# Altium PCB soldering_station_handle.PcbDoc
Units mil, origin at the board's own origin, x right, y up, seen from the top; angles counter-clockwise.
Board outline 1430 x 300 mil, 2 copper layers (Top Layer, Bottom Layer); 11 components, 6 nets, 23 pads, 17 vias.
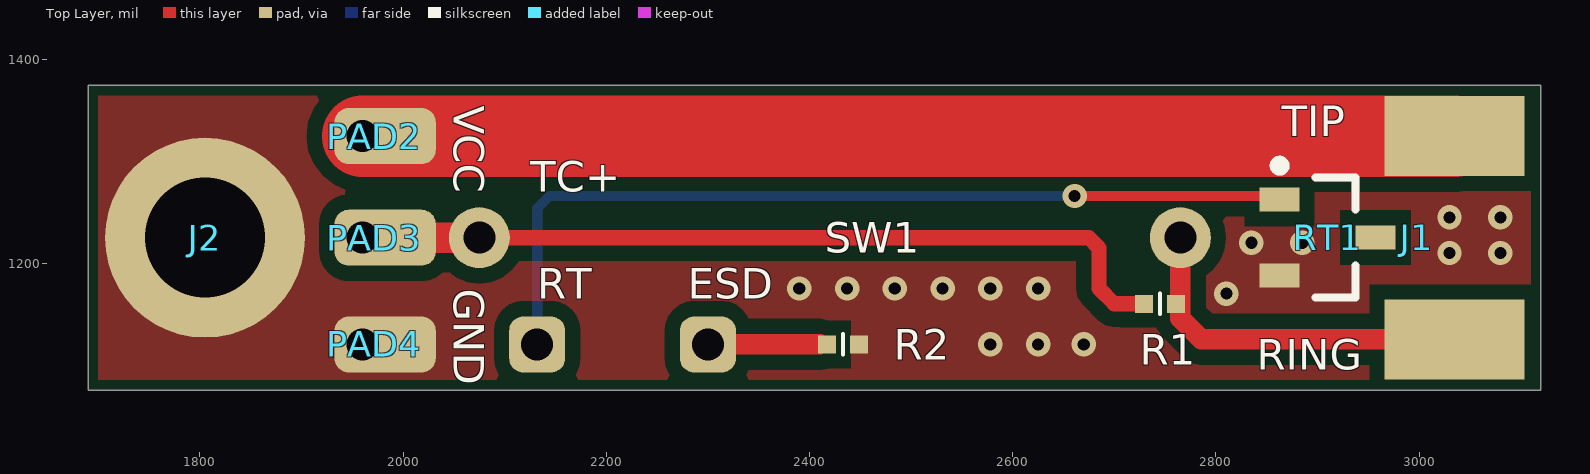
[diagram p0: Top Layer view]
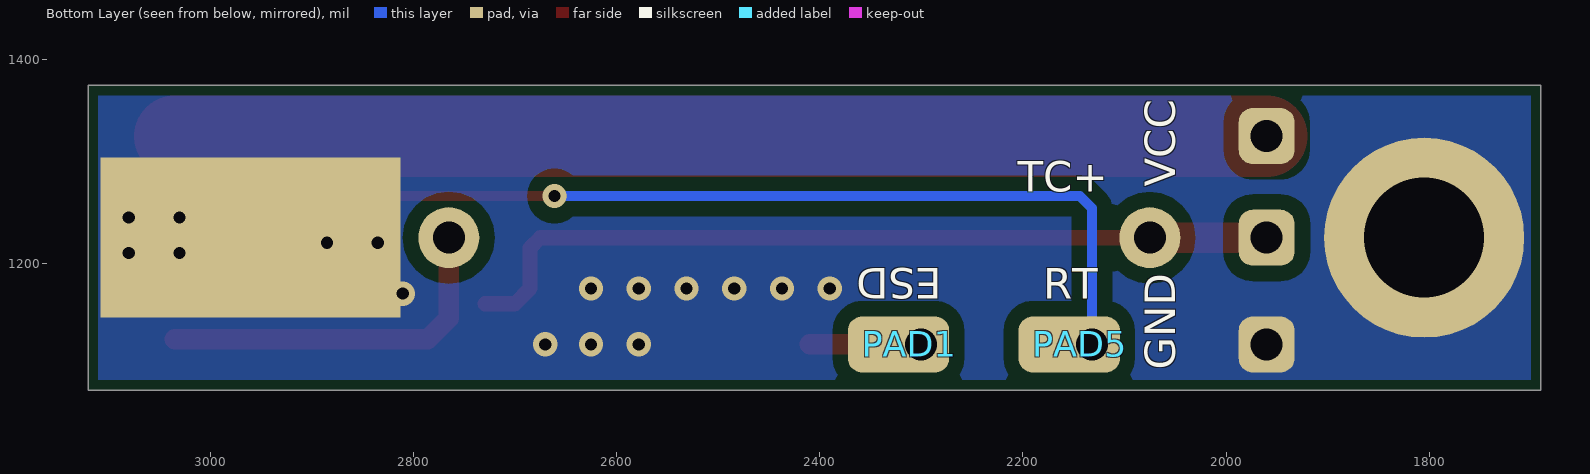
[diagram p1: Bottom Layer view, seen from below]

## Layer stack, top to bottom
Top Solder: solder mask 0.4, Solder Resist, Dk 3.5
Top Layer: signal copper 1.4
Dielectric 1: dielectric 12.6, FR-4, Dk 4.8
Bottom Layer: signal copper 1.4
Bottom Solder: solder mask 0.4, Solder Resist, Dk 3.5

## Board outline
1690,1075 3120,1075 3120,1375 1690,1375

## Design rules (kind name [scope] priority, off if disabled: settings)
BoardOutlineClearance [All] p1: gap=10 ignorepadtopadclearanceinfootprint=FALSE
Clearance [All] p1: gap=6 ignorepadtopadclearanceinfootprint=TRUE except(15: Arc-Poly Track-Poly SMDPad-Poly THPad-Poly Via-Poly Fill-Poly Poly-Poly)
DiffPairsRouting [All] p1: maxlimit=10 minlimit=6 mostfreqgap=7 toplayer_minwidth=6 toplayer_maxwidth=15 toplayer_prefwidth=6 bottomlayer_minwidth=6 bottomlayer_maxwidth=15 bottomlayer_prefwidth=6 maxuncoupledlength=500
HoleSize [All] p1: absolutevalues=TRUE maxlimit=248 minlimit=8 maxpercent=80.000 minpercent=20.000
MinimumSolderMaskSliver [All] p1: minsoldermaskwidth=1
PlaneConnect PlaneConnect_1 [All] p1: pad.planeconnectstyle=Relief pad.reliefexpansion=20 pad.reliefentries=4 pad.reliefconductorwidth=10 pad.reliefairgap=10 via.planeconnectstyle=Direct via.reliefexpansion=20 via.reliefentries=4 via.reliefconductorwidth=10 via.reliefairgap=10
PolygonConnect [All] p1: connectstyle=Direct reliefconductorwidth=20 reliefentries=4 polygonreliefangle="90 Angle" airgapwidth=10
RoomDefinition U_TXS0102YZPR1 [InComponentClass('U_TXS0102YZPR1')] p1: confinementstyle=ConfineIn formatcopy=TRUE lockcomponents=FALSE outline 3080,4000 3295,4000 3295,4195 3080,4195
RoutingVias [All] p1: holewidth=12 width=24 viastyle="Through Hole" minholewidth=11.81 minwidth=24 maxholewidth=12 maxwidth=24
SilkToSolderMaskClearance SilkToSolderMaskClearance_R0402 [HasFootprint('R_0402_1005')] p1: minsilkscreentomaskgap=4 clearancetoexposedcopper=TRUE
SilkToSolderMaskClearance [IsPad] p2: minsilkscreentomaskgap=5 clearancetoexposedcopper=TRUE
SolderMaskExpansion [InPadClass('All Pads')] p1: expansion=3
Width [All] p1: maxlimit=100 minlimit=6 preferedwidth=15 minimp=50.000000 maximp=50.000000 favimp=50.000000
25 further rules are at their usual default settings.

## Components (designator, comment, footprint, x,y, rotation, side; value= is the part's Value field where it differs from the comment)
J1 "PJ-392" PJ-392_Edge 3050,1225 r0 top
J2 "Cable soldering" J_HOLE3 1805,1225 r0 top value="3mm hole"
PAD1 "ESD" PAD_08mm 2300,1120 r90 top value="=\"Manufacturer Part Number\""
PAD2 "VCC" PAD_08mm 1960,1325 r270 bottom value="=\"Manufacturer Part Number\""
PAD3 "TC+" PAD_08mm 1960,1225 r270 bottom value="=\"Manufacturer Part Number\""
PAD4 "GND" PAD_08mm 1960,1120 r270 bottom value="=\"Manufacturer Part Number\""
PAD5 "RT" PAD_08mm 2132,1120 r90 top value="=\"Manufacturer Part Number\""
R1 "Resistor" R_0402_1005 2745,1160 r0 top value=1k
R2 "Resistor" R_0402_1005 2433,1120 r0 top value=0R
RT1 "KTY82-210" KTY82-210 2910,1225 r0 top value=1.98k
SW1 "KSK-1A66-1015" KSK-1A66-1015 2430,1230 r180 top

## Footprints (in the part's own frame and the unit in brackets; to place one, negate y for a bottom-side part, rotate by r counter-clockwise, add the part's x,y. Pads: shape width x height; smd on the part's side, far side on the other; paste and mask are expansions set on the pad)
J_HOLE3 [mm]
  round 5 hole 3: 1(0,0)
KSK-1A66-1015 [mil] "Kontaktron; Zakres: 10÷15AT; Pprze³: 10W; O2,2x14mm; Styki: SPST-NO"
  round 60 hole 31.5: 1(355,5) 2(-335,5)
  body extent -344,-40 364,47, height 112
KTY82-210 [mm] "Czujnik temperatury; -55÷150°C; SOT23; SMD; 1,98k?"
  rect 1x0.6 smd: 1(-1.2,0.95) 2(-1.2,-0.95) 3(1.2,0)
  silkscreen extent -1.32,-1.5 0.7,1.92, body extent -1.3,-1.5 1.3,1.5, height 1.2
PAD_08mm [mm]
  rrect50% 1.4x1.4 hole 0.8: 1(0,0)
  rrect50% 1.4x2.5 smd far side: 1(0,-0.584)
PJ-392_Edge [mm] "PJ-392_Stereo_Jack_3.5mm_Edge"
  rect 7.5x4 smd far side: 1(-2.286,0)
  rect 3.5x2 smd: 2(-0.381,-2.54) 3(-0.381,2.54)
  body extent -4.92,-3.94 17.88,3.94, height 5.15
R_0402_1005 [mm]
  rect 0.45x0.45 smd: 1(-0.4,0) 2(0.4,0)
  silkscreen extent 0,-0.25 0,0.25, body extent -0.52,-0.3 0.52,0.3, height 0.34

## Part data
J1: library part PJ-392_Jack_Plug, "PCB Edge Mount"
J2: library part J_HOLE3, "Single pin connector", Component Type="Standard (No BOM)", Part Number=J_HOLE3, SCH_Footprint=Cable, Supplier 1=TME, Supplier 2="RS Components", Supplier 3=Farnell, Supplier 4=Mouser, Supplier 5=Digi-Key
PAD1 PAD2 PAD3 PAD4 PAD5: library part J_PAD, "PCB Pad", Component Type=Standard, Part Number=J_PAD, SCH_Footprint=1.4x2.5mm, Supplier 1=TME, Supplier 2="RS Components", Supplier 3=Farnell, Supplier 4=Mouser, Supplier 5=Digi-Key
R1: library part R_1k_0402_1, Manufacturer=Yageo, Manufacturer Part Number=RC0402FR-071K, Power=63mW, Tolerance=1%, Voltage=50V, HelpURL=http://www.tme.eu/pl/Document/1a2bc76e2be68b3b1670068306778ce6/rc0402yageo.pdf, Part Number=R_1k_0402_1, SCH_Footprint=0402, Supplier 1=TME, Supplier 2="RS Components", Supplier 3=Farnell, Supplier 4=Mouser, Supplier 5=Digi-Key, Supplier Part Number 1=RC0402FR-071K, Supplier Part Number 3=9239235, Supplier Part Number 4=603-RC0402FR-071KP, Supplier Part Number 5=311-1.00KLRCT-ND
R2: library part R_0R_0402_5, Manufacturer=Rohm, Manufacturer Part Number=PMR01ZZPJ000, Power=100mW, Tolerance=5%, Voltage=50V, HelpURL=https://pl.mouser.com/datasheet/2/348/pmr-jpw-e-1139188.pdf, Part Number=R_0R_0402_5, SCH_Footprint=0402, Supplier 1=TME, Supplier 2="RS Components", Supplier 3=Farnell, Supplier 4=Mouser, Supplier 5=Digi-Key, Supplier Part Number 4=755-PMR01ZZPJ000, Supplier Part Number 5=RHM1692-6-ND
RT1: "Czujnik temperatury; -55÷150°C; SOT23; SMD; 1,98k?"
SW1: "Kontaktron; Zakres: 10÷15AT; Pprze³: 10W; O2,2x14mm; Styki: SPST-NO"

## Via types
v1: diameter 24, hole 12, Top Layer to Bottom Layer, 17 vias

## Nets (pads, with @x,y where several pads share a name; then routed paths per layer and width w, separated by ;. In a path a pad name is that pad's centre, name@x,y a point inside that pad or via, vN(x,y) a via of type N, cw(c..) or ccw(c..) an arc to the next point about the centre after c; other vN are vias at no path point)
GND: J1.1 J2.1 PAD4.1 R2.2 RT1.2
  other v1: 2578,1120 2625,1120 2670,1120 2810.39,1170 2390,1175 2437,1175 2484,1175 2531,1175 2578,1175 2625,1175 3030,1210 3080,1210 2835,1220 2885,1220 3030,1245 3080,1245
HT: J1.3 PAD2.1 | length 1075
  Top Layer w80: PAD2.1@1960,1325 1983,1325 J1.3
NetPAD1_1: PAD1.1 R2.1 | length 110
  Top Layer w20: PAD1.1@2300,1120 R2.1@2410,1120
NetPAD3_1: PAD3.1 R1.1 SW1.1 | length 819.6
  Top Layer w15: SW1.1 2675,1225 2685,1215 2685,1175 2700,1160 R1.1
  Top Layer w30: PAD3.1@1960,1225 1983,1225 SW1.1
NetPAD5_1: PAD5.1 RT1.1 | length 878.3
  Top Layer w10: v1(2661,1266) 2867.76,1266 RT1.1@2867.76,1262.4
  Bottom Layer w10: PAD5.1@2132,1120 2132,1254 2144,1266 v1(2661,1266)
TC: J1.2 R1.2 SW1.2 | length 357.8
  Top Layer w20: SW1.2 2765,1145.75 2785.75,1125 J1.2
pads on no net: RT1.3

## Polygon pours and split planes (outlines as drawn)
GND on Top Layer (solid, remove dead copper, pour order 0): 1690,1375 1690,1085 3120,1075 3120,1375
GND on Bottom Layer (solid, remove dead copper, pour order 4): 1575,1375 1575,1075 3120,1075 3120,1375

## Silkscreen, mask and mechanical layers (free items; w line width, h text height)
Top Overlay:
  text "VCC" at 2050,1355 h30 r270
  text "TC+" at 2125,1270 h30
  text "GND" at 2050,1175 h30 r270
Bottom Overlay:
  text "ESD" at 2280,1195 h30 r180
  text "RT" at 2180,1165 h30

## Dimensions
3120,1375 to 3120,1075 on Mechanical 1
1690,1375 to 3120,1375 on Mechanical 1

## Text inside footprints (layer, text, board x,y; h text height)
J1: Top Overlay "TIP" at 2865,1325 h30; Top Overlay "RING" at 2840,1095 h30
R1: Mechanical 19 "-" at 2714,1157 h30; Mechanical 17 "d" at 2713.87,1157.08 h30
R2: Mechanical 19 "-" at 2402,1117 h30; Mechanical 17 "d" at 2401.87,1117.08 h30